# Altium PCB LED_Driver.PcbDoc
Units mil, origin at the board's own origin, x right, y up, seen from the top; angles counter-clockwise.
Board outline 6000 x 4000 mil, 2 copper layers (Top Layer, Bottom Layer); 5 components, 6 nets, 15 pads, 0 vias.
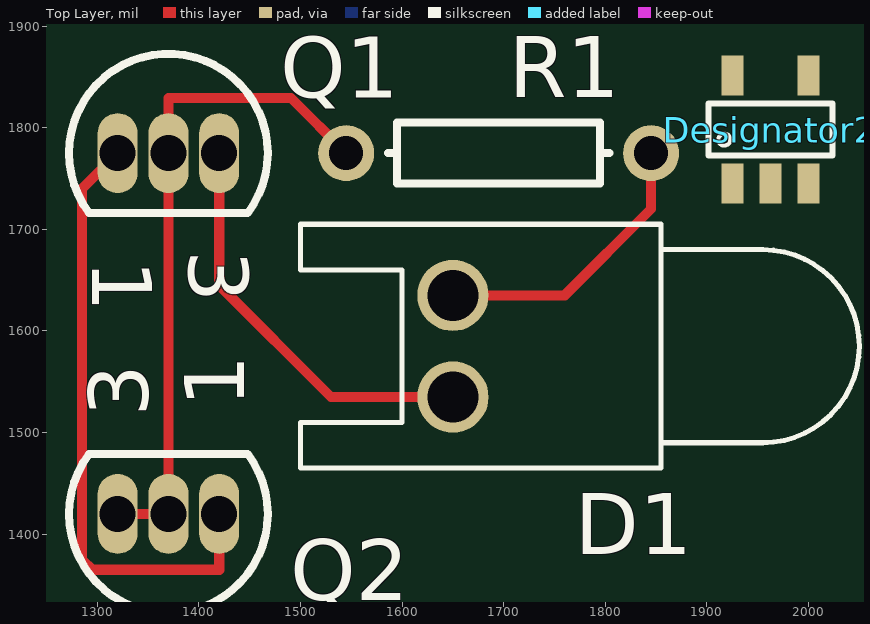
[diagram p0: Top Layer view]
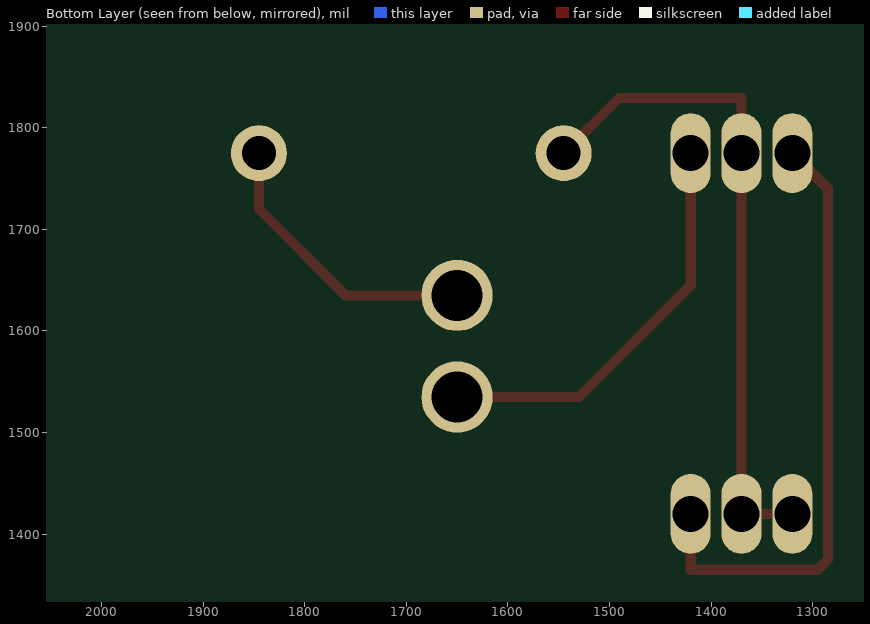
[diagram p1: Bottom Layer view, seen from below]

## Layer stack, top to bottom
Top Solder: solder mask 0.4, Solder Resist, Dk 3.5
Top Layer: signal copper 1.4
Dielectric 1: dielectric 12.6, FR-4, Dk 4.8
Bottom Layer: signal copper 1.4
Bottom Solder: solder mask 0.4, Solder Resist, Dk 3.5

## Board outline
1000,1000 7000,1000 7000,5000 1000,5000

## Design rules (kind name [scope] priority, off if disabled: settings)
Clearance [All] p1: gap=10
PolygonConnect [All] p1: connectstyle=Relief reliefconductorwidth=10 reliefentries=4 polygonreliefangle="90 Angle" airgapwidth=10
RoomDefinition LED_Driver [InComponentClass('LED_Driver')] p1: confinementstyle=ConfineIn formatcopy=TRUE lockcomponents=FALSE outline 1245,1295 2065,1295 2065,1920 1245,1920
RoutingVias [All] p1: holewidth=28 width=50 viastyle="Through Hole" minholewidth=28 minwidth=50 maxholewidth=28 maxwidth=50
SolderMaskExpansion [All] p1: expansion=4
Width [All] p1: maxlimit=10 minlimit=10 preferedwidth=10
30 further rules are at their usual default settings.

## Components (designator, comment, footprint, x,y, rotation, side; value= is the part's Value field where it differs from the comment)
D1 "LED0" LED-0 1650,1585 r90 top
Designator2 "Comment" LMV793 1925,1745 r0 top
Q1 "2N3904" TO-92A 1370,1775 r270 top
Q2 "2N3904" TO-92A 1370,1420 r90 top
R1 "Res1" AXIAL-0.3 1695,1775 r0 top

## Footprints (in the part's own frame and the unit in brackets; to place one, negate y for a bottom-side part, rotate by r counter-clockwise, add the part's x,y. Pads: shape width x height; smd on the part's side, far side on the other; paste and mask are expansions set on the pad)
AXIAL-0.3 [mm] "Axial Device, Thru-Hole; 2 Leads; 0.3 in Pin Spacing"
  round 1.4 hole 0.85: 1(-3.81,0) 2(3.81,0)
  silkscreen extent -2.77,-0.76 2.77,0.76
LED-0 [mil] "LED; 2 Leads"
  round 70 hole 50: 1(50,0) 2(-50,0)
  silkscreen extent -120,-400 120,150
LMV793 [mm] "88 MHz, Low Noise, 1.8V CMOS Input, Decompensated Operational Amplifiers"
  rect 0.55x1 smd mask+0.07: 1(0,0) 2(0.95,0) 3(1.9,0) 4(1.9,2.7) 5(0,2.7)
  silkscreen extent -0.6,0.7 2.5,2, body extent -0.5,-0.05 2.4,2.75, height 1.2
TO-92A [mm] "TO, Flat Index; 3 In-Line, Axial Leads; Body Dia. 4.5mm; Leads 0.51 x 0.48 mm (max)"
  oval 2x1 hole 0.9: 1(0,-1.27) 2(0,0) 3(0,1.27)
  silkscreen extent -2.48,-2.48 1.5,2.48

## Part data
D1: "Typical INFRARED GaAs LED"
Q1 Q2: "NPN General Purpose Amplifier"
R1: "Resistor"

## Nets (pads, with @x,y where several pads share a name; then routed paths per layer and width w, separated by ;. In a path a pad name is that pad's centre, name@x,y a point inside that pad or via, vN(x,y) a via of type N, cw(c..) or ccw(c..) an arc to the next point about the centre after c; other vN are vias at no path point)
GND: Q1.1 Q2.1 | length 608.6
  Top Layer w10: Q1.1 1285,1740 1285,1375 1295,1365 1420,1365 Q2.1
NetD1_2: D1.2 Q1.3 | length 405.6
  Top Layer w10: Q1.3 1420,1645 1530,1535 D1.2
NetIs_1: 
NetQ1_2: Q1.2 Q2.2 Q2.3 R1.1 | length 656.9
  Top Layer w10: Q2.3 Q2.2 Q1.2 1370,1829.37 1490.63,1829.37 R1.1
VCC: D1.1 R1.2 | length 285.2
  Top Layer w10: D1.1 1760,1635 1845,1720 R1.2
VO: 
pads on no net: Designator2.1 Designator2.2 Designator2.3 Designator2.4 Designator2.5

## Text inside footprints (layer, text, board x,y; h text height)
Q1: Top Overlay "1" at 1295.2,1670.28 h59.05 r270; Top Overlay "3" at 1390.08,1679.33 h59.05 r270
Q2: Top Overlay "1" at 1444.8,1524.72 h59.05 r90; Top Overlay "3" at 1349.92,1515.67 h59.05 r90